# Altium PCB FPSModule.PcbDoc
Units mm, origin at the board's own origin, x right, y up, seen from the top; angles counter-clockwise.
Board outline 26 x 13 mm, 4 copper layers (Top Layer, Ground Layer, Power Layer, Bottom Layer), stack 0.778 mm thick; 31 components, 16 nets, 88 pads, 53 vias.
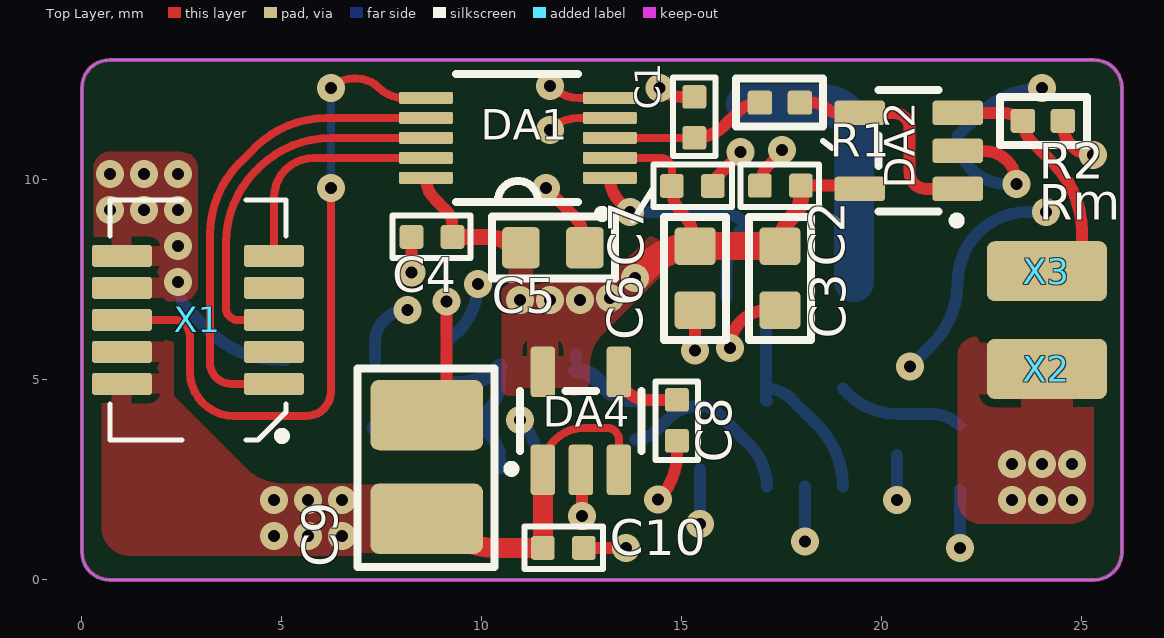
[diagram p0: Top Layer view]
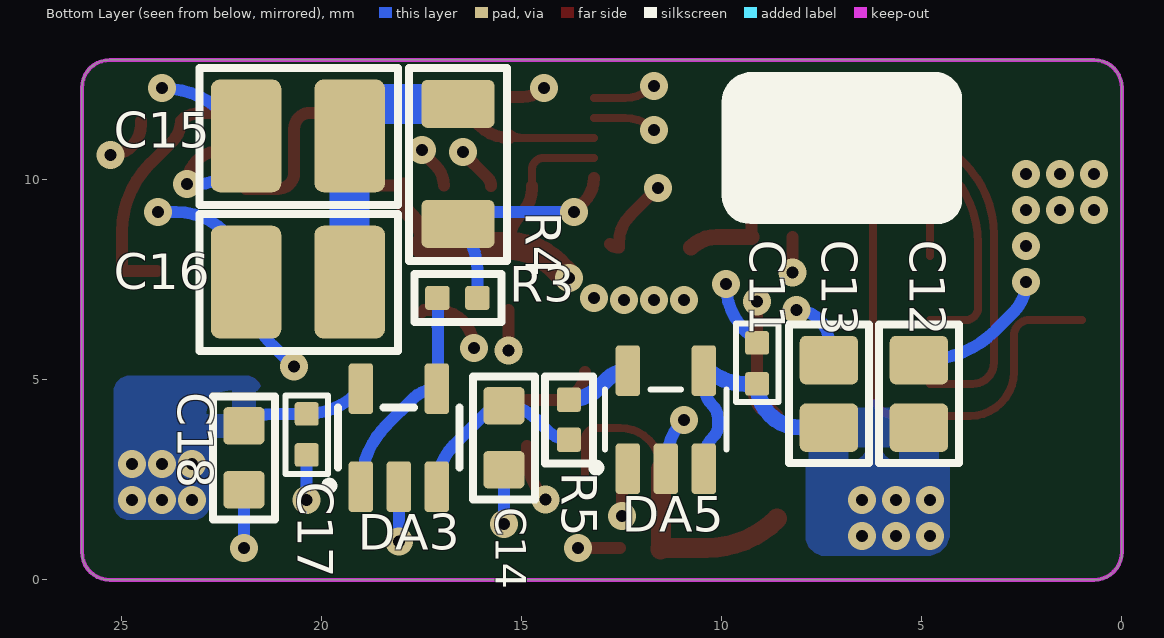
[diagram p1: Bottom Layer view, seen from below]
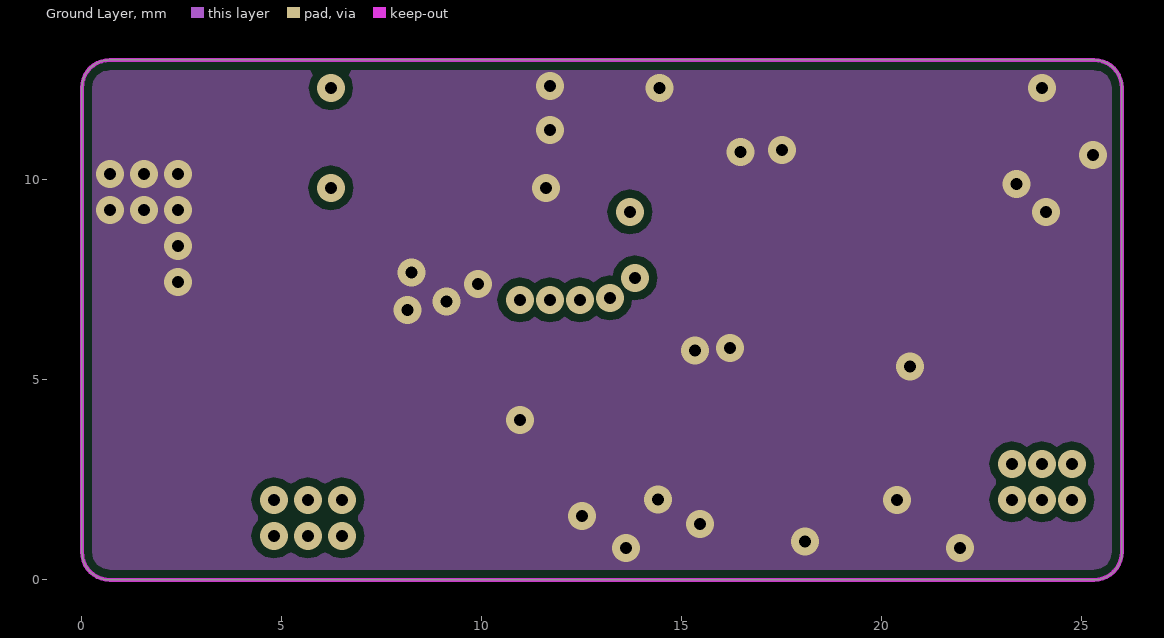
[diagram p2: Ground Layer]
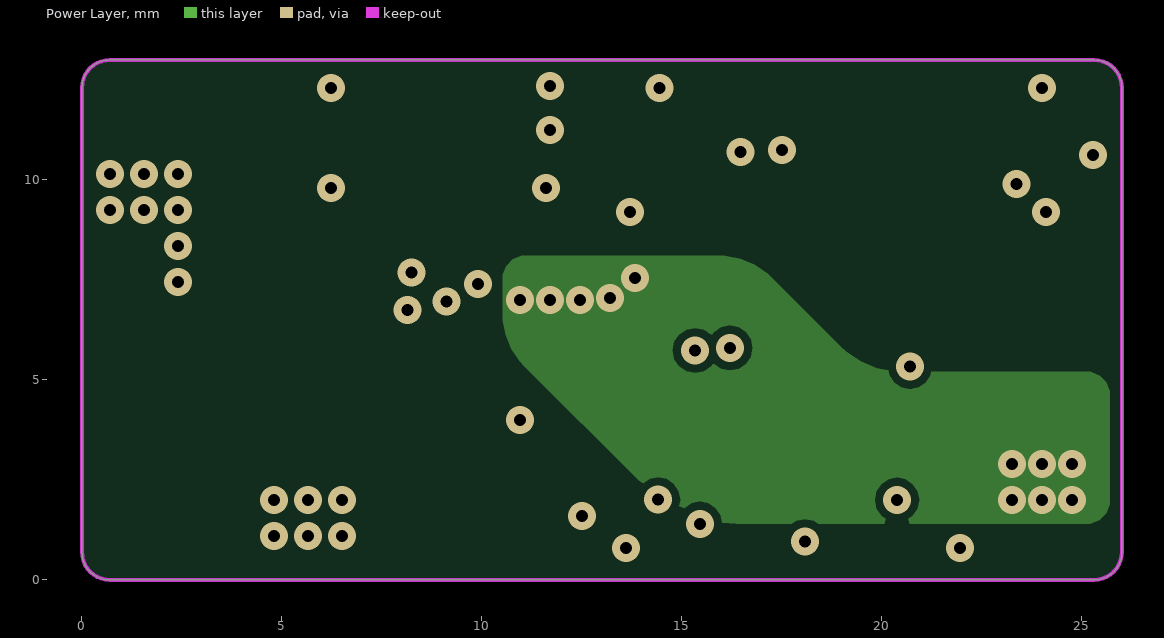
[diagram p3: Power Layer]
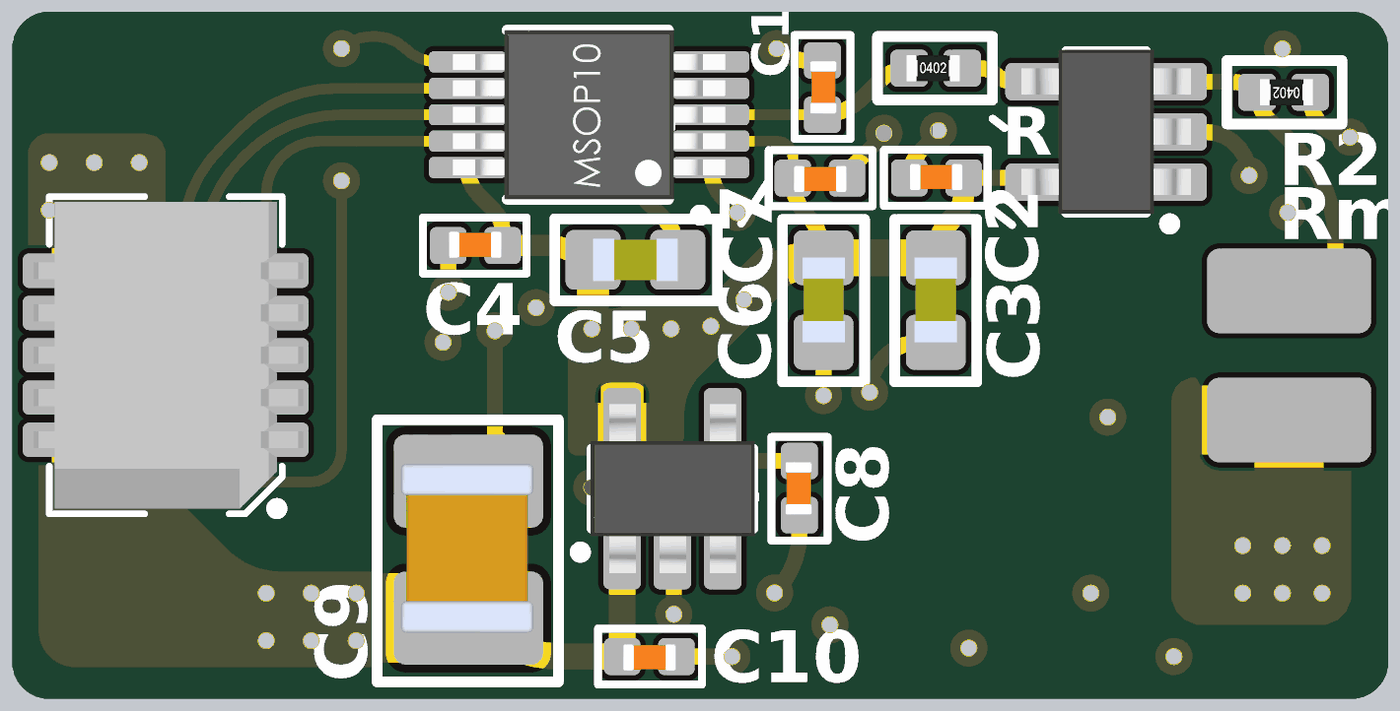
[diagram p4: 3D render of the assembled board from above, using the file's embedded part models]
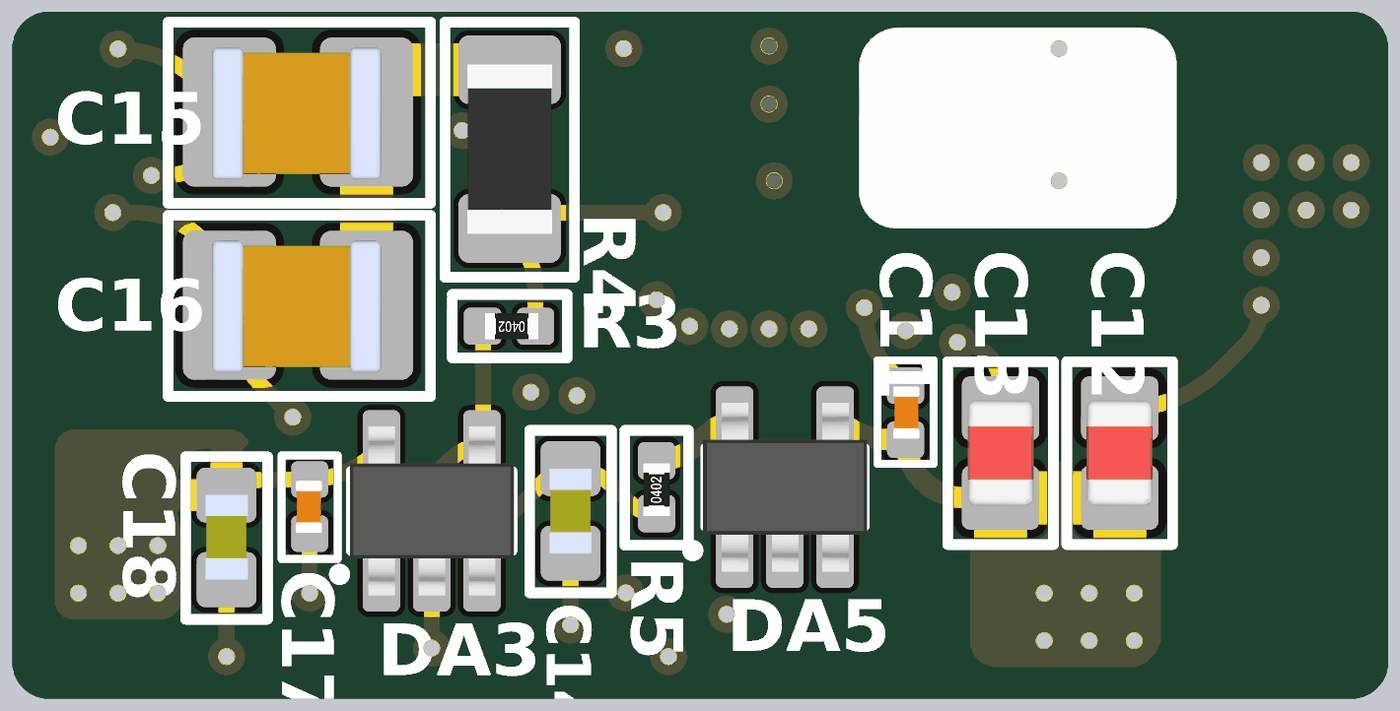
[diagram p5: 3D render of the assembled board from below, using the file's embedded part models]

## Layer stack, top to bottom
Top Solder: solder mask 0.0102, Solder Resist, Dk 3.5
Top Layer: signal copper 0.0356
Dielectric 1: core 0.254, FR-4, Dk 4.2
Ground Layer: signal copper 0.036
Dielectric 3: prepreg 0.127, Dk 4.2
Power Layer: signal copper 0.036
Dielectric 2: core 0.254, Dk 4.2
Bottom Layer: signal copper 0.0356
Bottom Solder: solder mask 0.0102, Solder Resist, Dk 3.5

## Board outline
0.7,0 cw(c0.7,0.7) 0,0.7 0,12.3 cw(c0.7,12.3) 0.7,13 25.3,13 cw(c25.3,12.3) 26,12.3 26,0.7 cw(c25.3,0.7) 25.3,0

## Design rules (kind name [scope] priority, off if disabled: settings)
Clearance [All] p1: gap=0.2 ignorepadtopadclearanceinfootprint=FALSE
HoleSize [All] p1: absolutevalues=TRUE maxlimit=20 minlimit=0.025 maxpercent=80.000 minpercent=20.000
MinimumSolderMaskSliver [All] p1: minsoldermaskwidth=0.02
PasteMaskExpansion [All] p1: expansion=0.05
PolygonConnect PolygonConnect_via [All vs IsVia] p1: connectstyle=Direct reliefconductorwidth=0.254 reliefentries=4 polygonreliefangle="90 Angle" airgapwidth=0.254
PolygonConnect PolygonConnect_+5В_С1210 [HasFootprint('C1210')] p2: connectstyle=Relief reliefconductorwidth=1.7 reliefentries=4 polygonreliefangle="90 Angle" airgapwidth=0.2
PolygonConnect PolygonConnect_С0805 [HasFootprint('C0805')] p3: connectstyle=Relief reliefconductorwidth=1 reliefentries=4 polygonreliefangle="90 Angle" airgapwidth=0.2
PolygonConnect PolygonConnect_TAB [HasFootprint('SOLD_1PAD')] p4: connectstyle=Relief reliefconductorwidth=1.3 reliefentries=4 polygonreliefangle="90 Angle" airgapwidth=0.2
PolygonConnect PolygonConnect_SOT [HasFootprint('SOT23-5')] p5: connectstyle=Relief reliefconductorwidth=0.8 reliefentries=4 polygonreliefangle="90 Angle" airgapwidth=0.2
PolygonConnect PolygonConnect_+3В3 [InNet('+3,3B')] p6: connectstyle=Relief reliefconductorwidth=0.6 reliefentries=4 polygonreliefangle="90 Angle" airgapwidth=0.4
PolygonConnect PolygonConnect_SMALSTICK [HasFootprint('SlimStack-10pin-angl-plg')] p7: connectstyle=Relief reliefconductorwidth=0.5 reliefentries=4 polygonreliefangle="90 Angle" airgapwidth=0.2
PolygonConnect [All] p8: connectstyle=Relief reliefconductorwidth=0.3 reliefentries=4 polygonreliefangle="90 Angle" airgapwidth=0.2
RoutingVias [All] p1: holewidth=0.711 width=1.27 viastyle="Through Hole" minholewidth=0.711 minwidth=1.27 maxholewidth=0.711 maxwidth=1.27
SilkToSilkClearance [All] p1: silktosilkclearance=0
SilkToSolderMaskClearance [IsPad] p1: minsilkscreentomaskgap=0 clearancetoexposedcopper=TRUE
SolderMaskExpansion [All] p1: expansion=0.15
Width [All] p1: maxlimit=3 minlimit=0.15 preferedwidth=0.2
25 further rules are at their usual default settings.

## Components (designator, comment, footprint, x,y, rotation, side; value= is the part's Value field where it differs from the comment)
C1 "1000" C0402 15.33,11.575 r270 top
C2 "0,1мк" C0402 17.45,9.875 r0 top
C3 "1мк" C0603 17.45,7.545 r90 top
C4 "0,1мк" C0402 8.74,8.595 r0 top
C5 "1мк" C0603 11.775,8.305 r180 top
C6 "1мк" C0603 15.33,7.545 r90 top
C7 "0,1мк" C0402 15.275,9.83 r180 top
C8 "0,1мк" C0402 14.855,3.975 r90 top
C9 "22мк" C1210 8.62,2.825 r270 top
C10 "0,1мк" C0402 12.05,0.78 r180 top
C11 "0,1мк" C0402 9.1,5.425 r270 bottom
C12 "4,7мк" C0805 5.075,4.65 r270 bottom
C13 "4,7мк" C0805 7.325,4.65 r270 bottom
C14 "1мк" C0603 15.45,3.555 r90 bottom
C15 "22мк" C1210 20.6,11.1 r180 bottom
C16 "22мк" C1210 20.6,7.445 r180 bottom
C17 "0,1мк" C0402 20.4,3.625 r90 bottom
C18 "1мк" C0603 21.95,3.055 r90 bottom
DA1 "ADS8866" MSOP10 10.9,11.05 r180 top
DA2 "OPA340" SOT23-5 20.67,10.725 r180 top
DA3 "OPA340" SOT23-5 18.075,3.555 r90 bottom
DA4 "TPS736DBV" SOT23-5 12.475,3.975 r90 top
DA5 "LM4132" SOT23-5 11.4,4.005 r90 bottom
R1 "Resistor_0,062Вт" R0402 17.45,11.93 r0 top value=510
R2 "Resistor_0,062Вт" R0402 24.025,11.475 r180 top value=10к
R3 "Resistor_0,062Вт" R0402 16.613,7.05 r0 bottom value=10
R4 "Resistor_1Вт" R1206 16.6,10.4 r270 bottom value=0,005
R5 "Resistor_0,062Вт" R0402 13.825,4.005 r90 bottom value=1к
X1 "Header_10_plg" SlimStack-10pin-angl-plg 2.9,6.5 r270 top locked
X2 "SoldPoint" SOLD_1PAD 24.125,5.275 r180 top
X3 "SoldPoint" SOLD_1PAD 24.125,7.717 r180 top

## Footprints (in the part's own frame and the unit in brackets; to place one, negate y for a bottom-side part, rotate by r counter-clockwise, add the part's x,y. Pads: shape width x height; smd on the part's side, far side on the other; paste and mask are expansions set on the pad)
C0402 [mm]
  rrect25% 0.59x0.6 smd: 1(-0.5,-0.02) 2(0.525,-0.02)
  silkscreen extent -0.98,-0.55 0.98,0.51, body extent -0.49,-0.25 0.51,0.25, height 0.48
C0603 [mm]
  rrect25% 0.94x1.03 smd: 1(-0.8,0) 2(0.8,0)
  silkscreen extent -1.55,-0.78 1.53,0.78, body extent -0.8,-0.4 0.8,0.4, height 0.9
C0805 [mm]
  rrect25% 1.21x1.46 smd paste-5: 1(-0.845,0) 2(0.845,0)
  silkscreen extent -1.73,-1 1.73,1, body extent -1,-0.62 1,0.63, height 0.78
C1210 [mm]
  rrect25% 1.76x2.82 smd paste-5: 1(-1.295,0) 2(1.295,0)
  silkscreen extent -2.45,-1.72 2.5,1.7, body extent -1.63,-1.27 1.57,1.23, height 1.65
MSOP10 [mm]
  rrect25% 1.35x0.3 smd: 1(-2.3,1) 2(-2.3,0.5) 3(-2.3,0) 4(-2.3,-0.5) 5(-2.3,-1) 6(2.3,-1) 7(2.3,-0.5) 8(2.3,0) 9(2.3,0.5) 10(2.3,1)
  silkscreen extent -2.2,-1.6 1.55,2, body extent -2.57,-1.6 2.58,1.6, height 1.09
R0402 [mm]
  rrect25% 0.61x0.6 smd: 1(-0.5,0) 2(0.5,0)
  silkscreen extent -1.1,-0.6 1.08,0.6, body extent -0.55,-0.25 0.45,0.25, height 0.35
R1206 [mm]
  rrect25% 1.2x1.83 smd: 1(-1.5,0) 2(1.5,0)
  silkscreen extent -2.4,-1.23 2.43,1.22, body extent -1.6,-0.8 1.6,0.8, height 0.55
SlimStack-10pin-angl-plg [mm]
  rrect25% 0.55x1.5 smd: 1(1.6,1.9) 2(1.6,-1.9) 3(0.8,1.9) 4(0.8,-1.9) 5(0,1.9) 6(0,-1.9) 7(-0.8,1.9) 8(-0.8,-1.9) 9(-1.6,1.9) 10(-1.6,-1.9)
  silkscreen extent -3,-2.2 3,2.2, body extent -2.9,-2.5 2.9,2.6, height 4.67
SOLD_1PAD [mm]
  rrect25% 3x1.5 smd: 1(0,0)
SOT23-5 [mm]
  rrect25% 1.26x0.61 smd: 1(-1.225,0.95) 2(-1.225,0) 3(-1.225,-0.95) 4(1.225,-0.95) 5(1.225,0.95)
  silkscreen extent -1.3,-1.52 0.75,1.84, body extent -1.6,-1.56 1.6,1.55, height 1.45

## Part data
C1: library part cap28, "Конденсатор", Manufacture=Murata, Part Name=Ceramic, Part Number=GRM1555C1H102J, Voltage=50B, id=cap28, TKE=NP0
C2 C4 C7 C8 C10 C11 C17: library part cap277, "Конденсатор", Manufacture=Murata, Part Name=Ceramic, Part Number=GRM155R71H104KE14D, Voltage=50В, id=cap277, tga=0,10%, TKE=X7R
C3 C5 C6 C14 C18: library part cap133, "Конденсатор", Manufacture=Murata, Part Name=Ceramic, Part Number=GRM188R71C105KA12D**, Voltage=16B, id=cap133, TKE=X7R
C9 C15 C16: library part cap294, "Конденсатор", Manufacture=TDK, Part Name=MLCC, Part Number=C3225X7R1C226M, Voltage=16B, id=cap294, tga=0,20%, TKE=X7R
C12 C13: library part cap224, "Конденсатор", Manufacture=Murata, Part Name=Ceramic, Part Number=GRM21BZ71H475KE15L, Voltage=50В, id=cap224, TKE=X7R
DA1: library part ADS8866IDGSR, "100-kSPS, serial interface, micropower, miniature,  single-ended input, SAR", Current Consumption=50nA, Manufacture="Texas Instruments", Part Name="SAR analog-to-digital converter", Power Supply=2.7-3.6V, Sample frequence="100 kS/s", ADC=SAR, Channels=1, id=adc4, Input channel=Single-Ended, Interface=SPI, Part Number=ADS8866IDGSR, Resolution=16bit, Type Supply="Single Polar"
DA2 DA3: library part amp23, "Operational Amplifiers / MicroAmplifier", Input Bias Current=0,2pA, Manufacture="Texas Instruments", Offset voltage=150uB, Part Name="Operational Amplifiers MicroAmplifier", Part Number=OPA340NA/250, Supply Current max=0,75mA, Supply Voltage=2,7-5,5B, Bandwidth=5,5MHz, Channels=1, CMRR=80dB, id=amp23, PSRR=100dB, Rail-to-rail=yes
DA4: library part pwr113, "400-mA Low-Dropout Regulator with Reverse Current  Protection", Current=400mA, Dropout Voltage=75mB, Input Voltage=1,7-5,5В, Manufacturer="Texas Instruments", Output Voltage=3,3B, Part Name="Low-Dropout Regulator with Reverse Current Protection", Part Number=TPS73633DBV, id=pwr113, Type=Linear
DA5: library part LM4132AMF-3.3/NOPB, "Precision Low Dropout Voltage Reference", Manufacturer="Texas Instruments", Max input voltage=5,5B, Output current=20mA, Voltage min stabilize=3,3B, Working current=60uA, Accuracy=0,0005, id=ref4, Part Name="Precision Low Dropout Voltage Reference", Part Number=LM4132AMF-3.3/NOPB
R1: library part res263, "Резистор", Manufacture=Yageo, Part Name=Resistor, Part Number=RC0402FR-07510RL, Power=0,062Вт, Accuracy=0,01, id=res263
R2: library part res294, "Резистор", Manufacture=Yageo, Part Name=Resistor, Part Number=RC0402FR-0710KL, Power=0,062Вт, Accuracy=0,01, id=res294
R3: library part res222, "Резистор", Manufacture=Yageo, Part Name=Resistor, Part Number=RC0402FR-0710RL, Power=0,062Вт, Accuracy=0,01, id=res222
R4: library part res1314, "Резистор", Manufacture="Stackpole Electronics Inc", Part Name=Resistor, Part Number=CSRF1206FT5L00, Power=1Вт, Accuracy=0,01, id=res1314
R5: library part res270, "Резистор", Manufacture=Yageo, Part Name=Resistor, Part Number=RC0402FR-071KL, Power=0,062Вт, Accuracy=0,01, id=res270
X1: library part connect227, "Разъем - 10 конт. вилка", Manufacture=Molex, Part Name="SlimStack Board-to-Board plug", Part Number=533091070, Contact_1=DOUT, Contact_2=+5B, Contact_3=NC, Contact_4=+5B, Contact_5=SCLK, Contact_6=CONVST, Contact_7=NC, Contact_8=GND, Contact_9=DIN, Contact_10=GND, Etch=0.8mm, id=connect227
X2 X3: library part connect220, Part Name="Пады на запайку", Contact_1=Contact_1, id=connect220

## Via types
v1: diameter 0.7, hole 0.3, Top Layer to Bottom Layer, tented both sides, 53 vias

## Nets (pads, with @x,y where several pads share a name; then routed paths per layer and width w, separated by ;. In a path a pad name is that pad's centre, name@x,y a point inside that pad or via, vN(x,y) a via of type N, cw(c..) or ccw(c..) an arc to the next point about the centre after c; other vN are vias at no path point)
+3,3B: C2.2 C3.2 C4.2 C5.2 C6.2 C7.2 C17.2 C18.2 DA1.2 DA1.10 DA2.5 DA3.5 DA4.5 X2.1 | length 17.2
  Top Layer w0.2: DA1.2 14.45,10.55 cw(c14.45,10.25) 14.75,10.25 C7.2
  Top Layer w0.3: DA1.10 ccw(c9.336,10.05) 8.816,9.53 9.1,9.245 cw(c8.702,8.847) 9.265,8.847 C4.2 ; C7.2 14.75,9.778 ccw(c15.603,9.778) 15,9.175 cw(c14.203,8.378) 15.33,8.378 C6.2 ; C2.2 19.312,9.855 cw(c19.312,9.667) DA2.5@19.445,9.8
  Top Layer w0.4: C4.2 10.123,8.575 cw(c10.123,7.653) C5.2@10.775,8.305 ; C3.2 cw(c18.488,8.345) 17.754,9.079 17.825,9.15 ccw(c17.463,9.512) 17.975,9.512 C2.2
  Top Layer w0.7: v1@13.9,7.611 14.142,7.853 cw(c15.33,6.664) C6.2 C3.2
  Bottom Layer w0.3: DA3.5 19.142,4.663 ccw(c20.38,5.9) C17.2 21.238,4.15 cw(c21.238,3.143) C18.2
  other v1: 23.25,2 24,2 24.75,2 23.25,2.9 24,2.9 24.75,2.9 10.95,7 11.7,7 12.45,7 13.2,7.05 13.825,7.55
+5B: C9.2 C10.2 C11.2 C12.2 C13.2 DA4.1 DA4.3 DA5.3 DA5.4 X1.2 X1.4 | length 15.3
  Top Layer w0.2: DA4.3@13.425,2.625 DA4.3 13.425,3.5 ccw(c13.125,3.5) 13.125,3.8 12.549,3.8 ccw(c12.549,2.776) DA4.1@11.525,2.776 ; DA4.1@11.525,2.776 DA4.1 DA4.1@11.525,2.776
  Top Layer w0.5: C9.2 ccw(c10.382,3.292) 10.382,0.8 C10.2 ; DA4.1@11.525,2.776 C10.2 ; C10.2@11.54,0.764 ccw(c11.489,0.764) C10.2
  Bottom Layer w0.3: DA5.3 10.45,2.996 ccw(c9.596,2.996) 10.2,3.6 cw(c10.441,3.841) 10.1,3.841 10.1,4.048 cw(c10.527,4.048) 10.225,4.35 ccw(c9.682,4.893) 10.45,4.893 DA5.4 DA5.4@10.45,5.33
  Bottom Layer w0.4: C13.2 8.025,3.805 ccw(c8.025,4.9) C11.2 9.409,4.9 ccw(c9.409,6.368) 10.447,5.33 DA5.4@10.45,5.33
  other v1: 4.8,1.1 5.65,1.1 6.5,1.1 4.8,2 5.65,2 6.5,2
GND: C1.1 C2.1 C3.1 C4.1 C5.1 C6.1 C7.1 C8.1 C9.1 C10.1 C11.1 C12.1 C13.1 C14.1 C15.1 C16.1 C17.1 C18.1 DA1.4 DA1.5 DA2.2 DA3.2 DA4.2 DA5.2 R2.1 X1.8 X1.10 | length 47.5
  Top Layer w0.2: v1(11.7,11.25) cw(c12.424,10.526) 12.424,11.55 DA1.4 ; v1(11.7,12.35) ccw(c12.424,13.074) 12.424,12.05 DA1.5
  Top Layer w0.3: v1(8.24,7.692) C4.1 ; v1(9.12,6.964) 9.12,4.98 9.3,4.8 C9.1 ccw(c8.62,4.7) C9.1@9.2,4.7 ; v1(11.6,9.8) 12.3,9.1 cw(c11.636,8.436) 12.575,8.436 C5.1 ccw(c12.575,8.619) C5.1@12.797,8.397 ; DA4.2@12.475,2.625 12.5,2.6 v1(12.5,1.6) ; C10.1 v1(13.6,0.8) ; v1(14.405,2.005) ccw(c13.27,3.14) 14.875,3.14 C8.1@14.875,3.35 ; v1(14.445,12.3) ccw(c14.988,12.843) 14.988,12.075 C1.1 ; v1(15.33,5.737) C6.1 ; C7.1 cw(c16.077,9.85) 15.863,10.063 v1@16.485,10.685 ; v1(16.2,5.8) cw(c17.145,5.8) 17.145,6.745 C3.1 C3.1@17.495,6.7 ; C2.1 cw(c17.662,9.855) 17.159,10.359 17.5,10.7 v1(17.5,10.75) ; DA2.2@22.038,10.725 DA2.2 22.545,10.725 cw(c22.545,9.9) v1(23.37,9.9) v1@23.47,10 ; R2.1 24.525,11.379 ccw(c25.279,11.379) v1(25.279,10.625)
  Bottom Layer w0.3: v1(2.4,7.445) ccw(c3.475,7.445) 2.715,6.685 3.161,6.239 ccw(c4.957,8.035) 4.957,5.495 C12.1 ; C13.1 7.325,5.93 cw(c8.14,5.93) v1(8.14,6.745) 8.195,6.745 v1@8.24,6.7 ; C11.1 9.409,6.213 ; 9.409,6.214 ccw(c8.222,7.4) v1(9.9,7.4) ; v1(10.95,4) cw(c9.864,2.914) 11.4,2.914 DA5.2 ; v1(15.45,1.4) C14.1 ; v1(18.075,0.96) DA3.2 ; v1(20.38,2) C17.1 ; v1(20.7,5.33) 21.244,5.874 ccw(c19.673,7.445) C16.1 cw(c23.65,7.445) 23.65,9.2 v1(24.1,9.2) ; v1(21.95,0.801) C18.1 ; v1(23.37,9.9) 23.095,9.9 cw(c23.095,11.1) C15.1 22.444,11.649 cw(c24,10.092) v1(24,12.293)
  other v1: 2.4,8.345 0.7,9.245 1.55,9.245 2.4,9.245 0.7,10.145 1.55,10.145 2.4,10.145 16.47,10.7
NetC1_2: C1.2 DA1.3 R1.1 | length 4.4
  Top Layer w0.2: DA1.3 15.008,11.05 ; C1.2 15.008,11.05 ; C1.2@15.31,11.175 cw(c15.008,11.477) 15.008,11.05
  Top Layer w0.3: C1.2 ccw(c15.31,12.112) 16.061,11.361 16.404,11.704 cw(c16.95,11.158) R1.1
NetC8_2: C8.2 DA4.4 | length 1.8
  Top Layer w0.3: DA4.4 ccw(c14.125,5.2) 14.125,4.5 C8.2
NetC14_2: C14.2 DA3.3 R5.1 | length 4.7
  Bottom Layer w0.3: R5.1 ccw(c13.825,4.241) 14.346,3.721 14.648,4.023 cw(c15.45,3.22) C14.2 cw(c15.45,3.715) 15.902,4.168 16.69,3.38 cw(c15.64,2.33) DA3.3
NetC15_2: C15.2 C16.2 R4.1 | length 6.8
  Bottom Layer w1: R4.1 18.505,11.9 cw(c18.505,11.1) C15.2 C16.2
NetDA1_1: DA1.1 R3.1 R4.2 | length 6
  Top Layer w0.3: DA1.1 ccw(c14.045,10.05) 13.448,9.452 v1(13.7,9.2)
  Bottom Layer w0.3: v1(13.7,9.2) 15.876,9.2 cw(c15.876,8.176) R4.2 ccw(c17.777,7.723) 16.113,7.723 R3.1
NetDA1_6: DA1.6 X1.6 | length 17.5
  Top Layer w0.2: X1.6 2.3,6.5 cw(c2.3,6.1) 2.7,6.1 2.7,5.2 ccw(c3.8,5.2) 3.8,4.1 5.622,4.1 ccw(c5.622,4.7) 6.222,4.7 v1(6.222,9.8) v1@6.222,9.85 ; v1(6.222,12.3) cw(c6.777,11.745) 6.777,12.53 6.875,12.53 cw(c6.875,11.745) 7.43,12.3 ccw(c8.034,12.904) 8.034,12.05 DA1.6
  Bottom Layer w0.2: v1(6.222,9.8) v1(6.222,12.3)
NetDA1_7: DA1.7 X1.1 | length 12.1
  Top Layer w0.2: X1.1 3.737,4.9 cw(c3.737,5.437) 3.2,5.437 3.2,8.629 cw(c5.74,8.629) 3.944,10.426 4.324,10.806 cw(c6.121,9.01) 6.121,11.55 DA1.7
NetDA1_8: DA1.8 X1.5 | length 9.5
  Top Layer w0.2: X1.5 3.9,6.5 cw(c3.9,6.8) 3.6,6.8 3.6,8.428 cw(c6.14,8.428) 4.344,10.224 4.426,10.306 cw(c6.222,8.51) 6.222,11.05 DA1.8
NetDA1_9: DA1.9 X1.9 | length 5.8
  Top Layer w0.2: X1.9 4.8,9.55 cw(c5.8,9.55) 5.8,10.55 DA1.9
NetDA2_1: DA2.1 DA2.4 R1.2 | length 5.6
  Top Layer w0.3: R1.2 18.286,11.93 cw(c18.286,11.486) 18.6,11.8 ccw(c18.902,12.102) 18.902,11.675 DA2.4 20.295,11.675 cw(c20.295,11.275) 20.695,11.275 20.695,10.175 ccw(c21.095,10.175) 21.095,9.775 DA2.1
NetDA2_3: DA2.3 R2.2 X3.1 | length 6.8
  Top Layer w0.3: DA2.3 23.042,11.675 cw(c23.042,10.992) R2.2 ccw(c24.249,11.475) 23.737,10.963 24.293,10.407 cw(c22.586,8.7) 25,8.7 25,7.717 X3.1
NetDA3_1: DA3.1 DA3.4 R3.2 | length 5.9
  Bottom Layer w0.3: R3.2@17.1,7.05 17.1,6.32 ; 17.112,6.35 ccw(c17.143,6.32) 17.1,6.32 ; DA3.4@17.125,4.475 cw(c17.125,4.5) 17.1,4.5 17.1,6.32 ; DA3.4 cw(c17.125,3.935) 17.723,4.532 18.389,3.866 cw(c16.852,2.33) 18.618,3.597 cw(c16.852,2.33) DA3.1
NetDA5_5: DA5.5 R5.2 | length 1.8
  Bottom Layer w0.3: DA5.5@12.35,5.505 DA5.5@12.35,5.65
  Bottom Layer w0.4: DA5.5 cw(c12.35,4.507) 12.861,5.018 13.056,4.824 ccw(c13.825,5.592) R5.2
pads on no net: DA5.1 X1.3 X1.7

## Polygon pours and split planes (outlines as drawn)
+3,3B on Top Layer "Top Layer-+3,3B" (solid, pour order 10): 21.9,5.615 21.9,2 ccw(c22.5,2) 22.5,1.4 24.7,1.4 ccw(c24.7,2) 25.3,2 25.3,6.08 22.365,6.08 ccw(c22.365,5.615)
GND on Top Layer "Top Signal Layer-No Net" (solid, remove dead copper, pour order 4): 0.3,6.964 2.474,6.964 ccw(c2.474,7.39) 2.9,7.39 2.9,10.285 ccw(c2.485,10.285) 2.485,10.7 0.7,10.7 ccw(c0.7,10.3) 0.3,10.3
+5B on Top Layer "Top Signal Layer-No Net" (solid, remove dead copper, pour order 2): 0.5,6.025 1.575,6.025 2.3,6.025 2.3,4.6 4.088,2.812 ccw(c5.059,3.783) 5.059,2.41 9.43,2.41 9.43,0.6 1.2,0.6 cw(c1.2,1.3) 0.5,1.3
+3,3B on Top Layer "Top Signal Layer-No Net" (solid, remove dead copper, pour order 0): 10.685,4.604 12.274,4.604 ccw(c12.274,5.03) 12.7,5.03 12.7,5.402 cw(c13.708,5.402) 12.995,6.115 14.505,7.625 16,7.625 16,8.875 14.475,8.875 13.363,7.763 cw(c12.595,8.531) 12.595,7.445 11.489,7.445 11.489,8.8 10.5,8.8 10.5,4.789 ccw(c10.685,4.789)
+5B on Bottom Layer "Bottom Layer-+5B" (solid, pour order 6): 4.3,4.5 7.9,4.5 7.9,1.1 cw(c7.4,1.1) 7.4,0.6 4.9,0.6 cw(c4.9,1.2) 4.3,1.2
+3,3B on Bottom Layer "Bottom Layer-+3,3B" (solid, pour order 12): 21.9,5.1 24.8,5.1 cw(c24.8,4.7) 25.2,4.7 25.2,1.881 cw(c24.819,1.881) 24.819,1.5 23.2,1.5 cw(c23.2,1.9) 22.8,1.9 22.8,3 ccw(c22.436,3) 22.436,3.364 21.5,3.364 21.5,4.7 cw(c21.9,4.7)
GND on Ground Layer "Ground Layer-GND" (solid, pour order 8): 0,12.3 0,0.7 ccw(c0.7,0.7) 0.7,0 25.3,0 ccw(c25.3,0.7) 26,0.7 26,12.3 ccw(c25.3,12.3) 25.3,13 0.7,13 ccw(c0.7,12.3)
+3,3B on Power Layer "Power Layer-+3,3B" (solid, pour order 14): 11.1,8.1 15.876,8.1 cw(c15.876,6.11) 17.283,7.517 18.946,5.854 ccw(c20.524,7.431) 20.524,5.2 25.1,5.2 cw(c25.1,4.6) 25.7,4.6 25.7,2.021 cw(c25.079,2.021) 25.079,1.4 16.537,1.4 cw(c16.537,5.087) 13.93,2.48 11.076,5.334 cw(c12.423,6.681) 10.518,6.681 10.518,7.518 cw(c11.1,7.518)

## Keep-outs
Keep-Out Layer:
  the board outline again, w0.1

## Silkscreen, mask and mechanical layers (free items; w line width, h text height)
Top Overlay:
  lines w0.15: 13.773,8.992 14.295,9.8 ; 18.43,9.325 18.892,8.965 ; 18.525,10.975 18.75,10.8
  text "Rm" at 23.925,8.7 h1.52
Bottom Overlay:
  region: 4,12.016 4,9.5 ccw(c4.6,9.5) 4.6,8.9 9.3,8.9 ccw(c9.3,9.6) 10,9.6 10,11.95 ccw(c9.255,11.95) 9.255,12.695 4.679,12.695 ccw(c4.679,12.016)